# EAGLE board NB-IoT Bee.v96_3 (EAGLE 7.5.0)
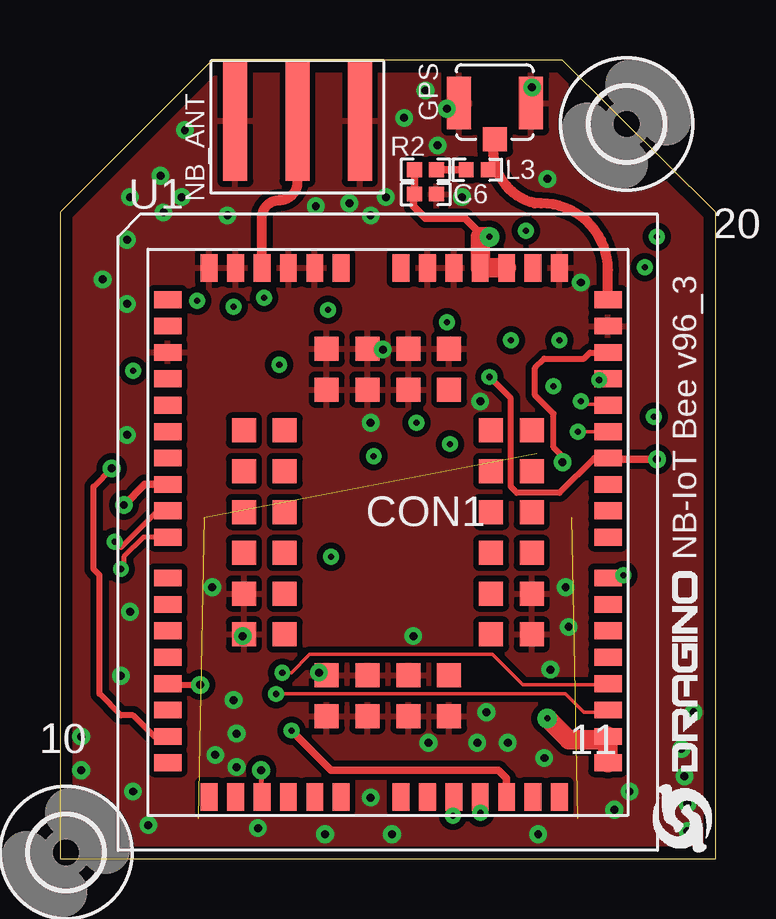
[diagram p0: board, top side]
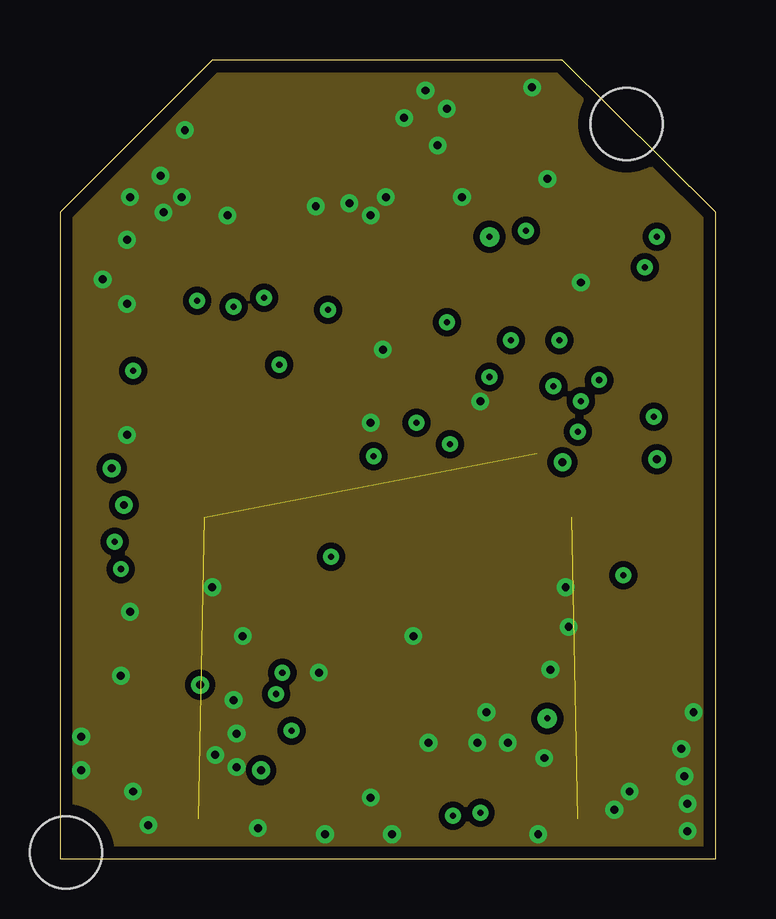
[diagram p1: board, inner layer Route2]
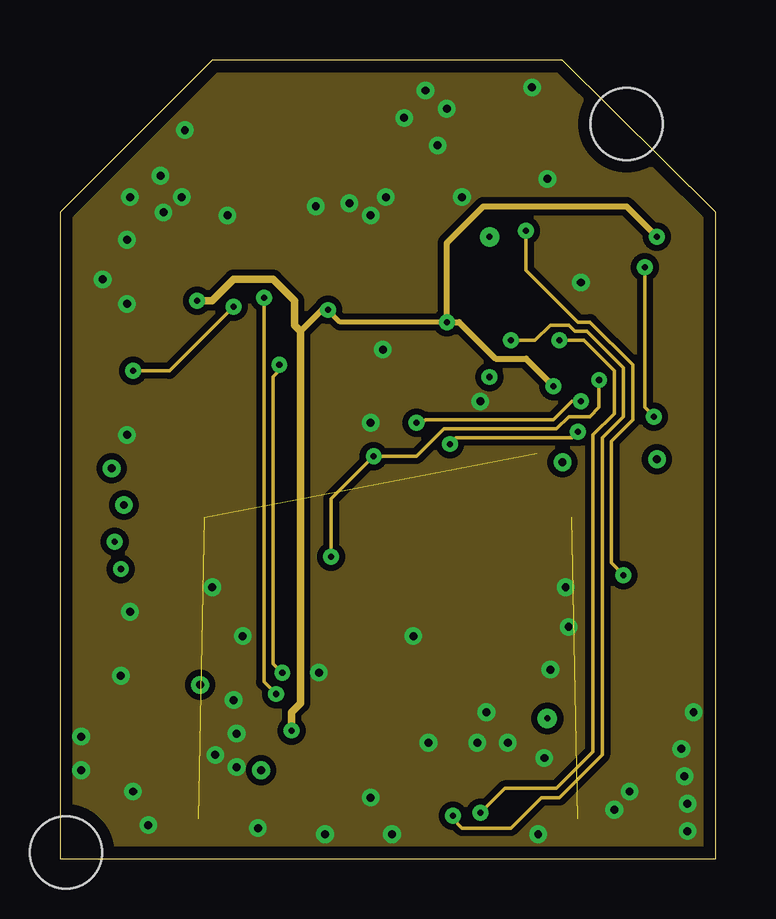
[diagram p2: board, inner layer Route15]
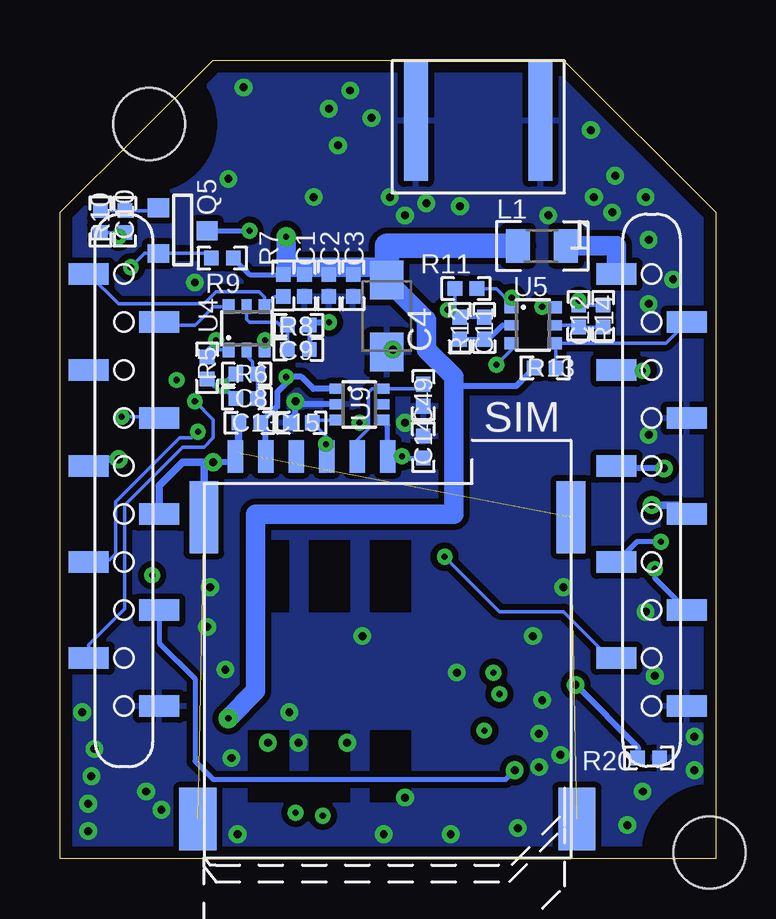
[diagram p3: board, bottom side, seen from below]

Size 27.34 x 33.27 mm. Coordinates in mm from the lower left corner, seen from the top.
Outline: 0,0 27.34,0 27.34,26.92 20.96,33.27 6.35,33.27 0,26.92 0,0
Copper layers (1*2+15*16): Top 0.035mm / dielectric 1.5mm / Route2 0.035mm / dielectric 0.15mm / Route15 0.035mm / dielectric 0.2mm / Bottom 0.035mm
Design rules "default *": minimum track width 8mil, minimum drill 10mil, track to track 6mil, track to pad 6mil, pad to pad 6mil, via to via 6mil, smd to smd 5mil, copper to edge 20mil, drill to drill 8mil, minimum pad ring 10mil, minimum via ring 8mil, stop-mask expansion 4mil, vias tented up to drill 25mil, thermal gap 10mil
Net classes: 0 default: width 0.203 mm, clearance 0.152 mm; 1 power: width 0.61 mm, drill 0.406 mm, clearance 0.254 mm; 2 gnd: width 0.305 mm, drill 0.33 mm, clearance 0.254 mm; 3 usbvcc: width 0.254 mm, drill 0.61 mm, clearance 0.254 mm; 4 aref: width 0.406 mm, drill 0.61 mm, clearance 0.254 mm; 5 usbtrace: width 0.254 mm, clearance 0.152 mm; 6 usbtrace-4layer: width 0.191 mm, clearance 0.203 mm

## Footprints (pad centres in the part's own frame; a part is rotated, then mirrored left to right if it is on the bottom)
C0402 = smd 0.61 x 0.61: 1 -0.457,0; 2 0.457,0
SMC_A = smd 1.6 x 1.4: + -1.5,0; - 1.5,0
BEE-SOCKET = smd 1.67 x 0.89 bottom: 1 -9.535,9; 2 -12.465,7; 3 -9.535,5; 4 -12.465,3; 5 -9.535,1; 6 -12.465,-1; 7 -9.535,-3; 8 -12.465,-5; 9 -9.535,-7; 10 -12.465,-9; 11 9.535,-9; 12 12.465,-7; 13 9.535,-5; 14 12.465,-3; 15 9.535,-1; 16 12.465,1; 17 9.535,3; 18 12.465,5; 19 9.535,7; 20 12.465,9
I-PEX = smd 1 x 2.2: GND -1.65,-0.27; GND1 1.35,-0.27 | smd 1 x 1: SIG -0.15,-1.77
C0805 = smd 1 x 1.4: 1 -1,0; 2 1,0
SMA-KE = smd 1 x 5: P$1 -2.6,0; P$2 2.6,0; P$5 0,0 | smd 1 x 5 bottom: P$3 -2.6,0; P$4 2.6,0
SOT-23 = smd 0.787 x 0.889: 1 0,-1.016; 2 -0.95,1.016; 3 0.95,1.016
R0402 = smd 0.61 x 0.61: 1 -0.457,0; 2 0.457,0
SIM-MICRO-PUSH = smd 0.65 x 1.35: CLK 7.91,15.105; GND 1.56,15.105; IO 6.64,15.105; RST 5.37,15.105; VCC 2.83,15.105; VPP 4.1,15.105 | smd 1.55 x 2.6: P$1 0,0; P$2 15.8,0 | smd 1.2 x 3: P$3 15.55,12.58; P$4 0.25,12.58
BG96 = smd 1.15 x 0.7: 1 -9.175,9.7; 2 -9.175,8.6; 3 -9.175,7.5; 4 -9.175,6.4; 5 -9.175,5.3; 6 -9.175,4.2; 7 -9.175,3.1; 8 -9.175,2; 9 -9.175,0.9; 10 -9.175,-0.2; 11 -9.175,-1.9; 12 -9.175,-3; 13 -9.175,-4.1; 14 -9.175,-5.2; 15 -9.175,-6.3; 16 -9.175,-7.4; 17 -9.175,-8.5; 18 -9.175,-9.6; 32 9.175,-9.6; 33 9.175,-8.5; 34 9.175,-7.4; 35 9.175,-6.3; 36 9.175,-5.2; 37 9.175,-4.1; 38 9.175,-3; 39 9.175,-1.9; 40 9.175,-0.2; 41 9.175,0.9; 42 9.175,2; 43 9.175,3.1; 44 9.175,4.2; 45 9.175,5.3; 46 9.175,6.4; 47 9.175,7.5; 48 9.175,8.6; 49 9.175,9.7 | smd 0.7 x 1.15: 19 -7.45,-11.025; 20 -6.35,-11.025; 21 -5.25,-11.025; 22 -4.15,-11.025; 23 -3.05,-11.025; 24 -1.95,-11.025; 25 0.55,-11.025; 26 1.65,-11.025; 27 2.75,-11.025; 28 3.85,-11.025; 29 4.95,-11.025; 30 6.05,-11.025; 31 7.15,-11.025; 50 7.15,11.025; 51 6.05,11.025; 52 4.95,11.025; 53 3.85,11.025; 54 2.75,11.025; 55 1.65,11.025; 56 0.55,11.025; 57 -1.95,11.025; 58 -3.05,11.025; 59 -4.15,11.025; 60 -5.25,11.025; 61 -6.35,11.025; 62 -7.45,11.025 | smd 1 x 1: 63 -6,4.25; 64 -6,2.55; 65 -6,0.85; 66 -6,-0.85; 67 -6,-2.55; 68 -6,-4.25; 69 -2.55,-7.65; 70 -0.85,-7.65; 71 0.85,-7.65; 72 2.55,-7.65; 73 6,-4.25; 74 6,-2.55; 75 6,-0.85; 76 6,0.85; 77 6,2.55; 78 6,4.25; 79 2.55,7.65; 80 0.85,7.65; 81 -0.85,7.65; 82 -2.55,7.65; 83 -4.3,4.25; 84 -4.3,2.55; 85 -4.3,0.85; 86 -4.3,-0.85; 87 -4.3,-2.55; 88 -4.3,-4.25; 89 -2.55,-5.95; 90 -0.85,-5.95; 91 0.85,-5.95; 92 2.55,-5.95; 93 4.3,-4.25; 94 4.3,-2.55; 95 4.3,-0.85; 96 4.3,0.85; 97 4.3,2.55; 98 4.3,4.25; 99 2.55,5.95; 100 0.85,5.95; 101 -0.85,5.95; 102 -2.55,5.95
SOT363-NXP = smd 0.5 x 0.6: 1 -0.75,-0.9; 3 0.75,-0.9; 4 0.75,0.9; 6 -0.75,0.9 | smd 0.42 x 0.6: 2 0,-0.9; 5 0,0.9
SOT363 = smd 0.42 x 0.6: 1 -0.65,-0.95; 2 0,-0.95; 3 0.65,-0.95; 4 0.65,0.95; 5 0,0.95; 6 -0.65,0.95
3,0 = hole 3: 0,0

## Placement (x,y rotation side)
C1  22pF  [C0402]  17.14,23.88 270 bottom
C2  100pF  [C0402]  16.13,23.88 270 bottom
C3  0.1uF  [C0402]  15.11,23.88 270 bottom
C4  100uF, 6.3v,钽电容  [SMC_A]  13.72,22.61 270 bottom
C6  0.1u  [C0402]  15.24,27.69 0 top
C8  1nf  [C0402]  19.56,19.18 0 bottom
C9  1nf  [C0402]  17.4,21.21 180 bottom
C10  1nf  [C0402]  24.64,26.54 90 bottom
C11  1nf  [C0402]  9.65,22.1 270 bottom
C12  1nf  [C0402]  5.71,22.61 270 bottom
C13  0.1u  [C0402]  19.43,18.16 180 bottom
C14  33pF  [C0402]  12.19,17.15 90 bottom
C15  33pF  [C0402]  17.27,18.16 180 bottom
C49  33pF  [C0402]  12.19,19.3 270 bottom
CON1  BEE-SOCKET  [BEE-SOCKET]  13.67,15.35 0 top
GPS  I-PEX  [I-PEX]  18.29,31.75 0 top
L1  PZ2012D301-1R5TF  [C0805]  7.24,25.53 0 bottom
L3  47nH  [C0402]  17.4,28.7 0 top
NB_ANT  NL  [SMA-KE]  9.91,30.73 180 top
Q5  BSS138-7-F  [SOT-23]  22.23,26.16 90 bottom
R2  10R  [R0402]  15.24,28.7 180 top
R5  10k  [R0402]  21.21,20.45 90 bottom
R6  4.7k  [R0402]  19.56,20.19 0 bottom
R7  10K  [R0402]  18.03,23.88 270 bottom
R8  4.7k  [R0402]  17.4,22.23 180 bottom
R9  22R  [R0402]  20.57,25.02 180 bottom
R10  4.7k  [R0402]  25.65,26.54 90 bottom
R11  10k  [R0402]  10.41,23.75 0 bottom
R12  4.7k  [R0402]  10.67,22.1 270 bottom
R13  10K  [R0402]  7.11,20.45 0 bottom
R14  4.7k  [R0402]  4.7,22.61 270 bottom
R20  2K  [R0402]  2.79,4.19 0 bottom
SIM  SIM_CARD_CON_6MICRO  [SIM-MICRO-PUSH]  21.59,1.65 0 bottom
U1  BG96  [BG96]  13.67,13.59 0 top
U4  2N7002KDW  [SOT363-NXP]  19.56,22.1 0 bottom
U5  2N7002KDW  [SOT363-NXP]  7.62,22.23 270 bottom
U9  SMF05C  [SOT363]  14.86,18.92 270 bottom
U$1  LOGO-NEW  [LOGO-SILK-NEW]  27.18,0.25 90 top
U$2  [3,0]  23.62,30.61 0 top
U$3  [3,0]  0.25,0.25 0 top

## Library data of the parts
C1-C4 C8-C15 C49 L1 R2 R5-R14 R20 U1 U4 U5 U9 U$1 = dragino
C6 CON1 GPS L3 SIM = dragino-passive
NB_ANT = sma-ke
Q5 = dragino; OC_FARNELL: unknown; OC_NEWARK: unknown
U$2 U$3 = holes

## Nets
!RESET: CON1.5 U1.17
DBG_RXD: U1.22
DBG_TXD: U1.23
GND [gnd]: C1.2 C2.2 C3.2 C4.- C6.2 C14.2 C15.2 C49.2 CON1.4 CON1.10 CON1.11 GPS.GND GPS.GND1 NB_ANT.P$1 NB_ANT.P$2 NB_ANT.P$3 NB_ANT.P$4 R20.2 U1.3 U1.48 U1.50 U1.54 U1.55 U1.58 U1.59 U1.61 U1.62 U1.67 U1.68 U1.69 U1.70 U1.71 U1.72 U1.73 U1.74 U1.79 U1.80 U1.81 U1.82 U1.89 U1.90 U1.91 U1.100 U1.101 U1.102 U9.2
GPS_RXD: CON1.19 U4.6
GPS_TXD: CON1.20 R7.2 U4.4
MAIN_RXD: CON1.3 U5.6
MAIN_TXD: CON1.2 R13.2 U5.4
N$1: R20.1 U1.15
N$3: C8.2 R6.2 U4.2
N$4: L3.1 R2.1
N$5: C9.2 R8.2 U4.5
N$6: C10.2 Q5.3 R10.2
N$7: C12.2 R14.2 U5.5
N$8: C11.2 R12.2 U5.2
N$12: GPS.SIG L3.2 U1.49
NETLIGHT: CON1.13 U1.21
RF_ANT: NB_ANT.P$5 U1.60
RI: CON1.17 Q5.2 R9.2
RI1: Q5.1 U1.39
UART1_RXD: R11.2 U1.34 U5.1
UART1_TXD: U1.35 U5.3
UART3_RXD: R5.2 U1.28 U4.1
UART3_TXD: U1.27 U4.3
USB_N: CON1.8 U1.10
USB_P: CON1.7 U1.9
USB_VBUS: CON1.6 U1.8
USIM_CLK: C14.1 CON1.9 SIM.CLK U1.46 U9.4
USIM_DATA: C49.1 CON1.12 SIM.IO U1.45 U9.6
USIM_GND: C13.2 CON1.15 SIM.GND SIM.P$1 SIM.P$2 SIM.P$3 SIM.P$4 U1.47
USIM_RST: C15.1 CON1.14 SIM.RST U1.44 U9.3
USIM_VDD: C13.1 CON1.16 SIM.VCC U1.43 U9.1
VBAT: C1.1 C2.1 C3.1 C4.+ C6.1 L1.1 R2.2 R7.1 R9.1 R13.1 U1.32 U1.33 U1.52 U1.53
VDD_18: C8.1 C9.1 C10.1 C11.1 C12.1 R5.1 R6.1 R8.1 R10.1 R11.1 R12.1 R14.1 U1.29
VIN: CON1.1 L1.2

## Tracks (layer width: path | path; a pad name or v marks a point on that pad's centre or on a via)
!RESET  (via drill 0.33)
  Top 0.254: U1.17 3.93,5.09 3.05,5.97 2.54,5.97 1.65,6.86 1.65,11.81 1.4,12.06 1.4,15.49 v2.16,16.26
  Bottom 0.254: v2.16,16.26 4.04,16.26 CON1.5
GND  (via drill 0.33)
  Bottom 0.152: 17.78,18.21 C15.2
  Bottom 0.254: 17.78,18.21 17.78,18.29 17.53,18.54 v17.53,19.05 17.4,18.92 U9.2
  other vias: 4.19,28.45 5.21,30.35 14.35,30.86 16.13,31.24 10.67,27.18 12.07,27.31 13.59,27.56 15.24,32 19.69,32.13 20.32,28.32 13.46,21.21 12.95,18.16 20.19,4.19 15.37,4.83 21.08,11.3 26.16,2.29 26.04,3.43 26.42,6.1 25.91,4.57 26.16,1.14 23.11,2.03 23.75,2.79 18.67,4.83 17.4,4.83 7.37,3.81 7.62,9.27 12.95,2.54 7.37,5.21 6.48,4.32 0.89,5.08 0.89,3.68 2.54,7.62 2.92,10.29 2.79,17.65 2.79,23.11 1.78,24.13 2.79,25.78 2.92,27.56 4.32,26.92 5.08,27.56 10.79,7.75 6.98,26.8 12.95,26.8 15.75,29.72 21.21,9.65 20.45,7.87 17.78,6.1 7.24,6.6 14.73,9.27 6.35,11.3 16.76,27.56 21.72,24 3.05,2.79 3.68,1.4 8.26,1.27 11.05,1.02 13.84,1.02 19.94,1.02
  pour Top (rank 2): -4.7,33.27 35.94,33.27 35.94,-3.56 -4.7,-3.56
  pour Bottom (rank 2): -4.7,33.02 35.94,33.02 35.94,-3.81 -4.7,-3.81
  pour Route15 (rank 2): -4.7,33.02 35.94,33.02 35.94,-3.81 -4.7,-3.81
  pour Route2 (rank 2): -4.7,33.02 35.94,33.02 35.94,-3.81 -4.7,-3.81
GPS_RXD
  Bottom 0.152: U4.6 20.94,23 21.72,22.23 23.08,22.23 CON1.19
GPS_TXD
  Bottom 0.152: R7.2 18.39,23.42 U4.4 18.81,23.38 19.05,23.62 20.83,23.62 21.34,23.11 24.9,23.11 CON1.20
MAIN_RXD  (via drill 0.25)
  Route15 0.152: v7.24,22.99 4.57,20.32 v3.05,20.32
  Bottom 0.152: U5.6 6.73,22.99 v7.24,22.99 | v3.05,20.32 3.08,20.35 CON1.3
MAIN_TXD
  Bottom 0.152: CON1.2 2.08,21.48 U5.4 6.65,21.41 R13.2
N$1  (via drill 0.33)
  Top 0.254: U1.15 4.55,7.24 v5.84,7.24
  Bottom 0.254: v5.84,7.24 3.25,4.65 R20.1
N$3
  Bottom 0.152: U4.2 19.56,20.96 19.3,20.7 19.3,20.4 R6.2 C8.2
N$4
  Top 0.305: R2.1 L3.1
N$5
  Bottom 0.152: C9.2 R8.2 18.16,22.23 18.29,22.35 19.43,22.35 19.56,22.48 U4.5
N$6
  Bottom 0.152: Q5.3 23.35,27 C10.2 R10.2
N$7
  Bottom 0.152: R14.2 C12.2 5.79,22.23 U5.5
N$8
  Bottom 0.203: R12.2 C11.2 9.47,21.64 8.89,22.23 U5.2
N$12
  Top 0.305: L3.2 17.91,28.7 18.03,28.83 18.03,29.88 GPS.SIG
  Top 0.406: U1.49 22.85,24.53 arc90 20.07,27.31 19.8,27.31 arc-90 GPS.SIG
NETLIGHT  (via drill 0.33)
  Top 0.203: v8.38,3.68 8.38,2.6 U1.21
  Bottom 0.203: CON1.13 23.21,8.98 21.72,7.49 21.72,4.06 20.96,3.3 8.76,3.3 v8.38,3.68
RF_ANT
  Top 0.406: NB_ANT.P$5 9.91,28.19 arc-90 9.14,27.43 arc90 8.42,26.71 U1.60
RI  (via drill 0.25)
  Route15 0.152: v24.38,24.64 24.38,18.8 v24.77,18.42
  Bottom 0.152: R9.2 21.22,25.21 Q5.2 23.81,25.21 v24.38,24.64 | v24.77,18.42 23.27,18.42 CON1.17
RI1  (via drill 0.25)
  Top 0.152: v23.5,11.81 22.97,11.81 U1.39
  Route15 0.152: v19.43,26.16 19.43,24.51 21.59,22.35 22.1,22.35 23.88,20.57 23.88,18.29 22.99,17.4 22.99,12.32 v23.5,11.81
  Bottom 0.203: Q5.1 v19.43,26.16
UART1_RXD  (via drill 0.25)
  Top 0.152: v9.02,6.86 21.08,6.86 21.84,6.1 22.75,6.1 U1.34
  Route15 0.152: v8.51,23.37 8.51,7.37 v9.02,6.86
  Bottom 0.152: R11.2 9.14,23.75 8.52,23.12 U5.1 8.52,23.36 v8.51,23.37
UART1_TXD  (via drill 0.25)
  Top 0.152: v9.27,7.75 9.65,7.75 10.41,8.51 18.03,8.51 19.3,7.24 22.8,7.24 U1.35
  Route15 0.152: v9.14,20.57 9.14,20.32 8.89,20.07 8.89,8.13 v9.27,7.75
  Bottom 0.152: 8.52,21.45 U5.3 8.52,21.2 v9.14,20.57
UART3_RXD  (via drill 0.25)
  Top 0.152: v17.53,1.91 U1.28
  Route15 0.152: v20.83,21.59 21.84,21.59 23.11,20.32 23.11,18.54 22.23,17.65 22.23,4.44 20.7,2.92 18.54,2.92 v17.53,1.91
  Bottom 0.152: U4.1 20.91,21.2 R5.2 21.21,21.21 v20.83,21.59
UART3_TXD  (via drill 0.25)
  Top 0.152: v16.38,1.78 16.42,1.82 U1.27
  Route15 0.152: v18.8,21.59 19.81,21.59 20.45,22.23 21.21,22.23 21.46,21.97 21.97,21.97 23.5,20.45 23.5,18.42 22.61,17.53 22.61,4.32 20.83,2.54 20.07,2.54 18.8,1.27 16.76,1.27 16.38,1.65 v16.38,1.78
  Bottom 0.254: U4.3 18.8,21.21 v18.8,21.59
USB_N  (via drill 0.25)
  Top 0.203: U1.10 3.48,13.39 2.67,12.57 2.67,12.32 2.54,12.19 v2.54,12.06
  Bottom 0.203: v2.54,12.06 2.54,11.69 CON1.8
USB_P  (via drill 0.25)
  Top 0.203: U1.9 4.08,14.49 2.54,12.95 v2.29,13.21
  Bottom 0.203: v2.29,13.21 3.28,13.21 CON1.7
USB_VBUS  (via drill 0.33)
  Top 0.305: U1.8 3.52,15.59 v2.67,14.73
  Bottom 0.305: v2.67,14.73 1.59,14.73 CON1.6
USIM_CLK  (via drill 0.25)
  Top 0.152: U1.46 22.53,19.99 v22.48,19.94
  Route15 0.152: v22.48,19.94 22.48,18.8 22.1,18.42 21.21,18.42 20.7,17.91 16,17.91 14.86,16.76 v13.08,16.76 11.3,14.99 v11.3,12.57
  Bottom 0.152: SIM.CLK 13.67,16.76 v13.08,16.76 | v11.3,12.57 9.02,10.29 6.35,10.29 4.42,8.35 CON1.9
  Bottom 0.203: v13.08,16.76 13.01,16.69 C14.1 | CON1.9 3.85,8.64 | SIM.CLK 13.68,18.04 U9.4
USIM_DATA  (via drill 0.25)
  Top 0.152: U1.45 22.81,18.92 21.84,18.92 v21.72,19.05
  Route15 0.152: v14.86,18.16 15.11,18.16 15.24,18.29 20.57,18.29 21.34,19.05 v21.72,19.05
  Bottom 0.152: C49.1 12.38,19.57 U9.6 14.34,19.57 14.48,19.43 14.48,18.16 | SIM.IO 14.95,17.44 14.48,17.91 14.48,18.16 | v14.86,18.16 14.48,18.16 | CON1.12 26.14,8.92 24.64,10.41 24.64,14.73 22.23,17.15 21.34,17.15 20.96,17.53 20.96,18.29 v21.72,19.05
USIM_GND  (via drill 0.33)  (3 unrouted)
  Top 0.254: 22.84,21.08 22.1,21.08 21.84,20.83 20.19,20.83 19.81,20.45 19.81,19.3 20.57,18.54 20.57,17.15 20.96,16.76 v20.96,16.51
  Top 0.305: 22.84,21.08 U1.47
  Bottom 0.254: SIM.GND 20.28,16.51 v20.96,16.51
  Bottom 0.305: CON1.15 23.21,15.53 22.23,16.51 v20.96,16.51 21.21,16.51 21.34,16.38 SIM.P$4 | SIM.GND 19.89,16.9 C13.2
USIM_RST  (via drill 0.25)
  Top 0.152: U1.44 22.84,17.78 v21.59,17.78
  Route15 0.152: v21.59,17.78 21.34,17.53 16.51,17.53 v16.26,17.27
  Bottom 0.152: U9.3 16.7,18.27 C15.1 16.26,17.6 v16.26,17.27 16.26,16.79 SIM.RST | 25.87,12.35 CON1.14 26.04,12.45 25.27,12.45 25.02,12.7 25.02,14.86 22.35,17.53 21.84,17.53 v21.59,17.78
USIM_VDD  (via drill 0.25, 0.33)
  Top 0.254: U1.43 22.28,16.69 20.83,15.24 19.05,15.24 18.8,15.49 18.8,19.18 v17.91,20.07
  Top 0.305: v24.89,16.64 22.9,16.64 U1.43
  Bottom 0.254: U9.1 16.78,19.57 17.27,20.07 v17.91,20.07 17.91,19.81 18.29,19.43 18.29,18.85 C13.1 18.76,17.95 SIM.VCC
  Bottom 0.305: v24.89,16.64 25.85,16.64 CON1.16
VBAT  (via drill 0.25 pad 0.81)
  Top 0.305: v17.91,25.91 17.65,26.16 17.4,26.16 16.89,26.67 15.24,26.67 14.73,27.18 14.73,27.64 C6.1 R2.2
  Top 0.813: U1.32 U1.33 22.71,4.95 21.21,4.95 v20.32,5.84 | v17.91,25.91 17.52,25.91 U1.53 U1.52
  Bottom 0.203: R9.1 19.43,24.33 R7.1 | C4.+ 13.72,24.64
  Bottom 0.254: 17.91,24.64 18.03,24.51 R7.1 | C1.1 16.84,24.64 16.64,24.64 | C2.1 15.82,24.64 15.62,24.64 | C3.1 15.11,24.64 | R13.1 8.33,19.69 10.92,19.69
  Bottom 0.813: C4.+ 12.07,22.46 12.07,21.21 10.92,20.07 10.92,19.69 10.92,14.35 19.18,14.35 19.18,6.98 v20.32,5.84 | v17.91,25.91 17.91,24.64 16.64,24.64 15.62,24.64 15.11,24.64 13.72,24.64
  Bottom 1.016: L1.1 13.72,25.53 13.72,24.64
VDD_18  (via drill 0.25)
  Top 0.305: U1.29 18.62,3.35 18.29,3.68 11.3,3.68 v9.65,5.33
  Route15 0.203: v16.13,22.35 11.68,22.35 v11.18,22.86
  Route15 0.254: 10.03,21.97 10.92,22.86 v11.18,22.86 | v24.89,25.91 23.62,27.18 17.65,27.18 16.13,25.65 v16.13,22.35 16.64,22.35 18.16,20.83 19.43,20.83 v20.57,19.69
  Route15 0.305: v9.65,5.33 9.65,6.1 10.03,6.48 10.03,21.97 9.78,22.23 9.78,23.24 8.89,24.13 7.24,24.13 6.35,23.24 v5.71,23.24
  Bottom 0.152: R14.1 C12.1 | R11.1 10.87,22.61 | R12.1 C11.1 | R10.1 C10.1
  Bottom 0.203: R6.1 20.07,20.19 v20.57,19.69 | R8.1 C9.1 | v20.57,19.69 20.9,19.69 R5.1 | C8.1 20.07,19.18 v20.57,19.69 | C10.1 24.82,25.91 v24.89,25.91
  Bottom 0.254: 11.12,22.86 v11.18,22.86 10.97,22.86 R12.1 10.72,22.61 10.87,22.61 | R8.1 16.82,22.35 v16.13,22.35
  Bottom 0.305: C12.1 v5.71,23.24
VIN
  Bottom 0.813: CON1.1 4.14,25.53 L1.2

## Text on the board
tPlace: NB-IoT Bee v96_3